# EAGLE board Meshtastic-DIY_v2.2 (EAGLE 9.6.2)
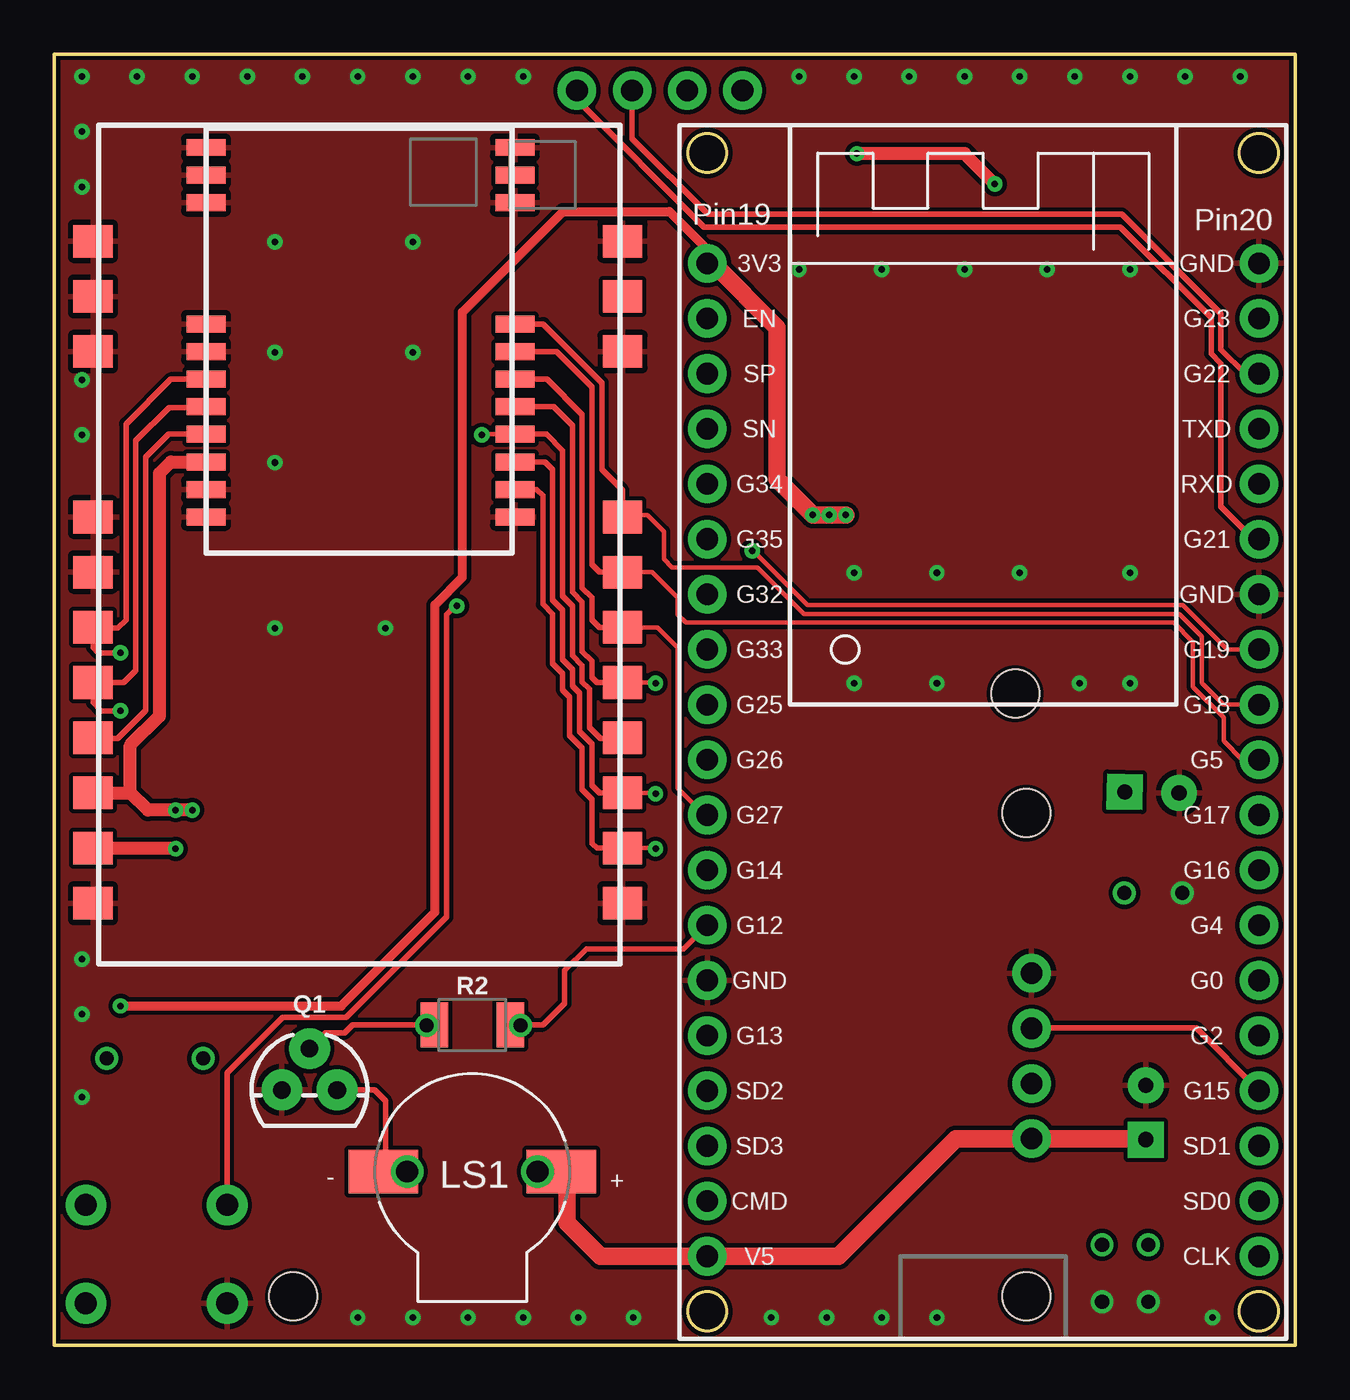
[diagram p0: board, top side]
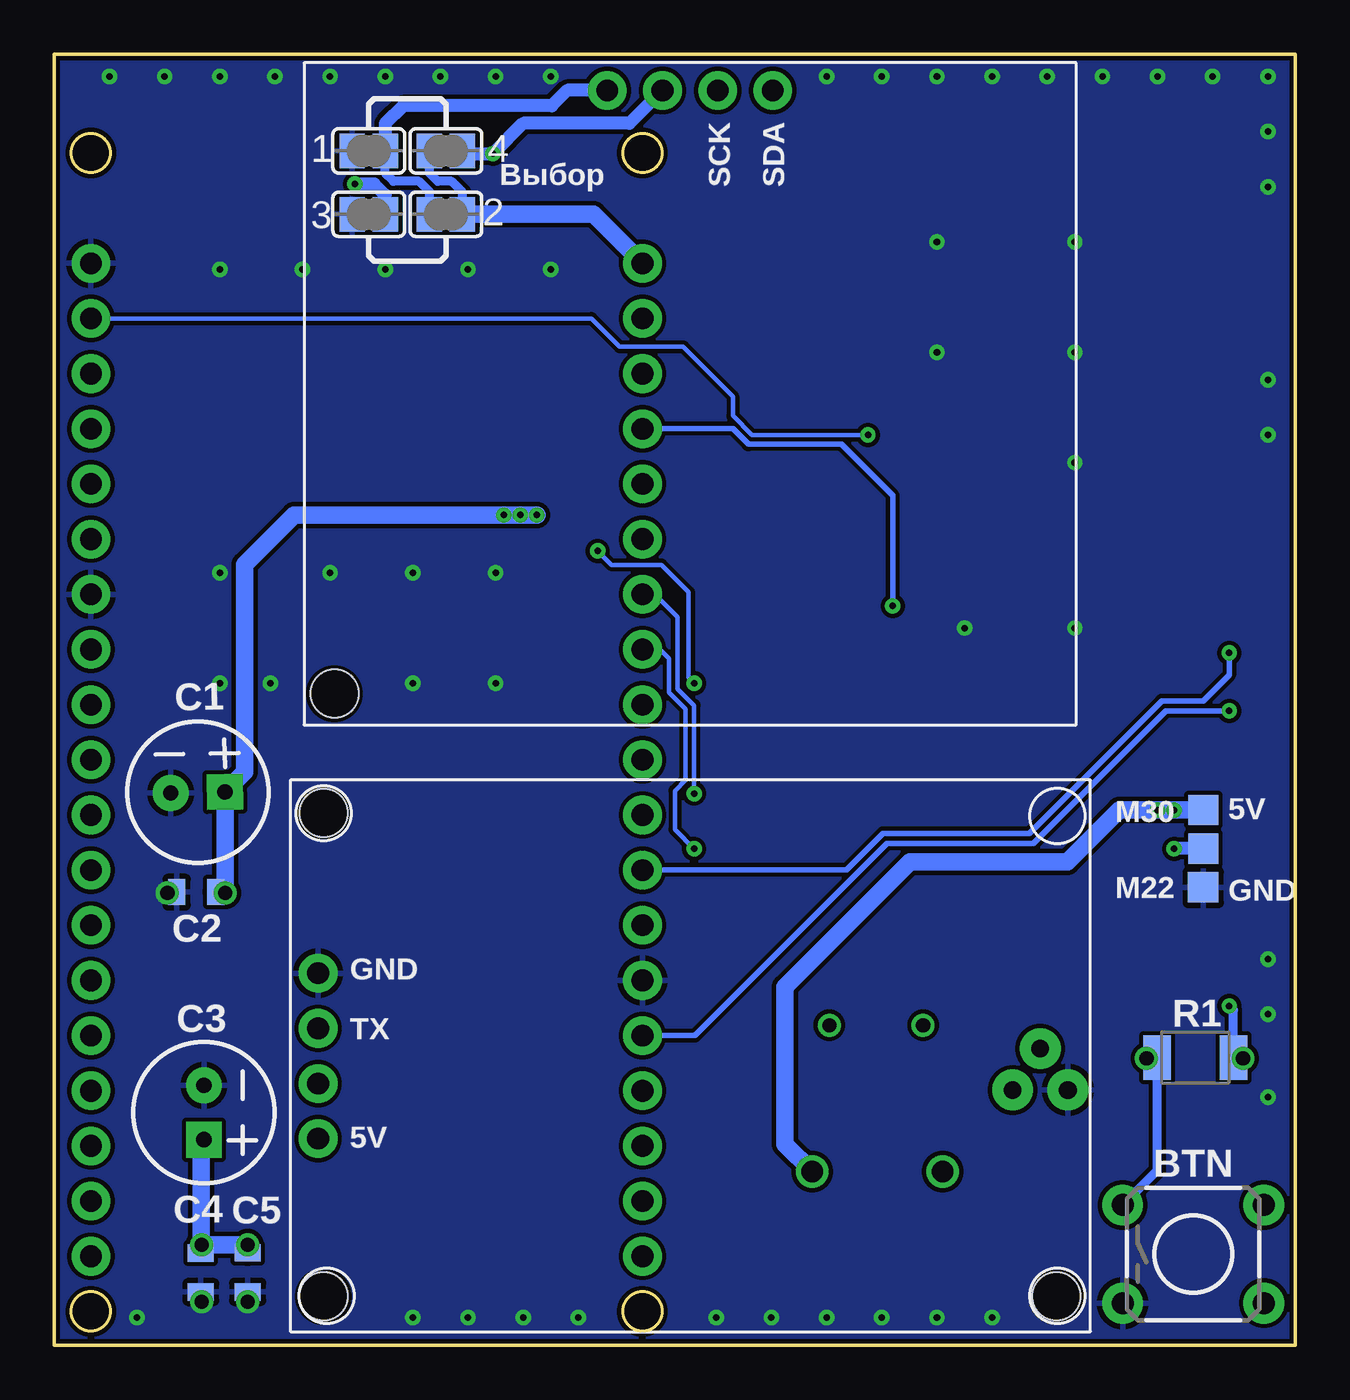
[diagram p1: board, bottom side, seen from below]

Size 57.15 x 59.44 mm. Coordinates in mm from the lower left corner, seen from the top.
Outline: 0,59.44 0,0 57.15,0 57.15,59.44 0,59.44
Copper layers (1*16): Top 0.035mm / dielectric 1.5mm / Bottom 0.035mm
Design rules "default *": minimum track width 0.2mm, minimum drill 0.25mm, track to track 0.2mm, track to pad 0.2mm, pad to pad 0.2mm, via to via 0.2mm, smd to smd 6mil, copper to edge 0.2mm, drill to drill 0.2mm, minimum pad ring 10mil, minimum via ring 8mil, stop-mask expansion 4mil, vias tented up to drill 0.35mm, thermal gap 10mil
Holes 2.2 mm at 44.75,24.5 44.75,2.25 11,2.25 44.25,30

## Footprints (pad centres in the part's own frame; a part is rotated, then mirrored left to right if it is on the bottom)
SJ = smd 1.168 x 1.6: 1 -0.762,0; 2 0.762,0
TACTILE_SWITCH_PTH_6.0MM = drill 1.016 pad 1.88: 1 -3.251,2.261; 2 3.251,2.261; 3 -3.251,-2.261; 4 3.251,-2.261
CPOL-RADIAL-2.5MM-6.5MM = drill 0.7 pad 1.651 square: 1 1.25,0 | drill 0.7 pad 1.651: 2 -1.25,0
0805 = smd 0.8 x 1.2: 1 -0.9,0; 2 0.9,0
NODEMCU_ESP32_WROOM_32--38PINS = drill 1 pad 1.778: 1 -13.97,-27.94; 2 -13.97,-25.4; 3 -13.97,-22.86; 4 -13.97,-20.32; 5 -13.97,-17.78; 6 -13.97,-15.24; 7 -13.97,-12.7; 8 -13.97,-10.16; 9 -13.97,-7.62; 10 -13.97,-5.08; 11 -13.97,-2.54; 12 -13.97,0; 13 -13.97,2.54; 14 -13.97,5.08; 15 -13.97,7.62; 16 -13.97,10.16; 17 -13.97,12.7; 18 -13.97,15.24; 19 -13.97,17.78; 20 11.43,17.78; 21 11.43,15.24; 22 11.43,12.7; 23 11.43,10.16; 24 11.43,7.62; 25 11.43,5.08; 26 11.43,2.54; 27 11.43,0; 28 11.43,-2.54; 29 11.43,-5.08; 30 11.43,-7.62; 31 11.43,-10.16; 32 11.43,-12.7; 33 11.43,-15.24; 34 11.43,-17.78; 35 11.43,-20.32; 36 11.43,-22.86; 37 11.43,-25.4; 38 11.43,-27.94
XDCR_CMT-0926-86-SMT-TR = smd 3.2 x 2: N 4.1,0; P -4.1,0
TO-92 = drill 0.813 pad 1.88: 1 -1.27,0; 2 0,1.905; 3 1.27,0
1210 = smd 1.27 x 2.06: 1 -1.755,0; 2 1.755,0
TP14SQ = smd 1.4 x 1.4: TP 0,0
E22-XXXM30S = smd 1.8 x 1.5: P$1 -11.938,15.24; P$2 -11.938,12.7; P$3 -11.938,10.16; P$4 -11.938,2.54; P$5 -11.938,0; P$6 -11.938,-2.54; P$7 -11.938,-5.08; P$8 -11.938,-7.62; P$9 -11.938,-10.16; P$10 -11.938,-12.7; P$11 -11.938,-15.24; P$12 12.446,-15.24; P$13 12.446,-12.7; P$14 12.446,-10.16; P$15 12.446,-7.62; P$16 12.446,-5.08; P$17 12.446,-2.54; P$18 12.446,0; P$19 12.446,2.54; P$20 12.446,10.16; P$21 12.446,12.7; P$22 12.446,15.24
1.3"OLED = drill 1 pad 1.778: GND 2.54,0; SCL 5.08,0; SDA 7.62,0; VCC 0,0
E22-XXXM22S = smd 1.8 x 0.78: P$1 -6.858,8.763; P$2 -6.858,7.493; P$3 -6.858,6.223; P$4 -6.858,0.635; P$5 -6.858,-0.635; P$6 -6.858,-1.905; P$7 -6.858,-3.175; P$8 -6.858,-4.445; P$9 -6.858,-5.715; P$10 -6.858,-6.985; P$11 -6.858,-8.255; P$12 7.366,-8.255; P$13 7.366,-6.985; P$14 7.366,-5.715; P$15 7.366,-4.445; P$16 7.366,-3.175; P$17 7.366,-1.905; P$18 7.366,-0.635; P$19 7.366,0.635; P$20 7.366,6.223; P$21 7.366,7.493; P$22 7.366,8.763
GPS-NEO = drill 1 pad 1.778: P$1 -3.81,16.51; P$2 -1.27,16.51; P$3 1.27,16.51; P$4 3.81,16.51

## Placement (x,y rotation side)
1  [SJ]  42.67,54.99 0 bottom
2  [SJ]  39.12,52.07 180 bottom
3  [SJ]  42.67,52.07 0 bottom
4  [SJ]  39.12,54.99 0 bottom
BTN  MOMENTARY-SWITCH-SPST-PTH-6.0MM  [TACTILE_SWITCH_PTH_6.0MM]  4.71,4.2 0 bottom
C1  100uF  [CPOL-RADIAL-2.5MM-6.5MM]  50.54,25.46 1.1 bottom
C2  100nF  [0805]  50.61,20.86 180 bottom
C3  100uF  [CPOL-RADIAL-2.5MM-6.5MM]  50.26,10.71 270 bottom
C4  100nF  [0805]  50.41,3.35 270 bottom
C5  100nF  [0805]  48.24,3.35 270 bottom
ESP32-1  [NODEMCU_ESP32_WROOM_32--38PINS]  44.04,32.04 0 top
LS1  CMT-0926-86-SMT-TR  [XDCR_CMT-0926-86-SMT-TR]  19.25,8 180 top
Q1  200mA/40V  [TO-92]  11.75,11.75 0 top
R1  10k  [1210]  4.61,13.25 180 bottom
R2  1k  [1210]  19.25,14.75 0 top
TP1  TPTP14SQ  [TP14SQ]  4.24,24.65 270 bottom
TP2  TPTP14SQ  [TP14SQ]  4.24,22.87 270 bottom
TP3  TPTP14SQ  [TP14SQ]  4.25,21.09 270 bottom
U1  E22-XXXM30S  [E22-XXXM30S]  13.72,35.59 0 top
U$1  13"OLED13"OLED  [1.3"OLED]  31.69,57.78 0 bottom
U$2  E22-XXXM22S  [E22-XXXM22S]  13.85,46.39 0 top
U$3  GPS-NEO  [GPS-NEO]  28.49,13.32 90 bottom

## Library data of the parts
1-4 = jumper
BTN = SparkFun-Switches; PROD_ID: SWCH-08441; SF_SKU: COM-00097
C1 C3 = SparkFun-Capacitors; PROD_ID: CAP-08439
C2 C4 C5 = SparkFun-Capacitors; PROD_ID: CAP-08469
ESP32-1 = ESP32 NODEMCU WROOM 32; ESP: ESP32 WROOM 32
LS1 = CMT-0926-86-SMT-TR; AVAILABILITY: In Stock; CUI_PURCHASE_URL: https://www.cuidevices.com/product/audio/buzzers/audio-transducers/cmt-0926-86-smt-tr?utm_source=snapeda.com&utm_medium=referral&utm_campaign=snapedaBOM; DESCRIPTION: 9 mm, 3.6 Vo-p, 86 dB, Surface Mount (SMT), Magnetic Audio Transducer Buzzer; MF: CUI Devices; MP: CMT-0926-86-SMT-TR; PACKAGE: CUI Inc.; PRICE: None; PURCHASE-URL: https://pricing.snapeda.com/search/part/CMT-0926-86-SMT-TR/?ref=eda
Q1 = SparkFun-DiscreteSemi; PROD_ID: TRANS-08447
R1 R2 = SparkFun-Resistors; PROD_ID: RES-12374
TP1-TP3 = testpad
U1 U$2 = E22-XXXMXXS
U$1 U$3 = 13oled

## Nets
+3V3: 2.1 4.1 C1.1 C2.1 ESP32-1.19 R1.1
+5V: C3.1 C4.1 C5.1 ESP32-1.1 LS1.P TP1.TP U1.P$9 U$2.P$9 U$3.P$1
BTN: BTN.1 ESP32-1.16 R1.2
BUSY: ESP32-1.13 U1.P$14 U$2.P$14
CMD/G11/RTS: ESP32-1.2
DIO0: ESP32-1.10
GND: 1.1 3.1 BTN.3 C1.2 C2.2 C3.2 C4.2 C5.2 ESP32-1.6 ESP32-1.20 ESP32-1.26 Q1.1 TP3.TP U1.P$1 U1.P$2 U1.P$3 U1.P$4 U1.P$5 U1.P$11 U1.P$12 U1.P$20 U1.P$22 U$2.P$1 U$2.P$2 U$2.P$3 U$2.P$4 U$2.P$5 U$2.P$10 U$2.P$11 U$2.P$12 U$2.P$20 U$2.P$22 U$3.P$4
GPS_TX: ESP32-1.35 U$3.P$3
IRQ: ESP32-1.12 U1.P$13 U$2.P$13
LCD_SCK: ESP32-1.22 U$1.SCL
LCD_SDA: ESP32-1.25 U$1.SDA
MISO: ESP32-1.27 U1.P$16 U$2.P$16
MOSI: ESP32-1.9 U1.P$17 U$2.P$17
N$1: 1.2 2.2 U$1.VCC
N$2: 3.2 4.2 U$1.GND
N$3: U$3.P$2
N$4: LS1.N Q1.3
N$5: ESP32-1.7 R2.2
N$6: Q1.2 R2.1
N$9: U1.P$8 U$2.P$8
NSS: ESP32-1.28 U1.P$19 U$2.P$19
RST: ESP32-1.21 U1.P$15 U$2.P$15
RXEN: ESP32-1.8 U1.P$6 U$2.P$6
SCK: ESP32-1.29 U1.P$18 U$2.P$18
TXEN: ESP32-1.5 U1.P$7 U$2.P$7
VCC2: TP2.TP U1.P$10

## Tracks (layer width: path | path; a pad name or v marks a point on that pad's centre or on a via)
+3V3  (via drill 0.3, 0.65)
  Top 0.2: v35.69,38.23 v36.45,38.23
  Top 0.406: v3.05,15.62 13.21,15.62 17.53,19.94 17.53,34.09 18.8,35.36 18.8,47.57 23.42,52.2 28.32,52.2 30.07,50.45 ESP32-1.19
  Top 0.813: ESP32-1.19 30.32,49.82 33.27,46.86 33.27,39.88 v34.92,38.23 v36.45,38.23
  Bottom 0.2: R1.1 2.82,13.21 v2.41,13.21
  Bottom 0.406: R1.1 2.85,15.43 v3.05,15.62 | 2.1 38.35,53.09 38.86,53.59 39.5,53.59 39.88,53.98 4.1
  Bottom 0.813: v34.92,38.23 46.1,38.23 48.39,35.94 48.39,26.38 C1.1 49.29,21.29 C2.1 49.67,20.83 v49.28,20.83 | ESP32-1.19 32.32,52.07 2.1
+5V  (via drill 0.3, 0.65, 1)
  Top 0.254: LS1.P v22.25,8
  Top 0.406: U$2.P$9 6.96,40.64 | 1.81,25.4 U1.P$9
  Top 0.61: 3.5,25.45 3.5,27.63 4.84,28.97 4.84,40.15 5.37,40.67 U$2.P$9 | 3.5,25.45 4.32,24.64 v5.59,24.64 v6.35,24.64 | U1.P$9 3.48,25.43 3.5,25.45
  Top 0.813: LS1.P 23.61,7.74 23.61,5.64 25.15,4.1 ESP32-1.1 36.1,4.1 41.51,9.51 U$3.P$1 50.21,9.51 C3.1
  Bottom 0.406: v48.25,4.62 C5.1 | 50.4,4.59 C4.1
  Bottom 0.61: C4.1
  Bottom 0.813: C5.1 | TP1.TP v5.58,24.65 | v5.58,24.65 v5.59,24.64 | v22.25,8 23.5,9.25 23.5,16.5 17.75,22.25 10.5,22.25 8.1,24.65 v5.58,24.65 | v50.37,4.62 v48.25,4.62 | v50.37,4.62 50.4,4.59 | C3.1 50.38,9.34 50.38,4.64 v50.37,4.62
BTN  (via drill 0.3, 0.65)
  Top 0.254: BTN.1 7.96,12.53 10.52,15.09 13.43,15.09 18.06,19.72 18.06,33.66 18.44,34.04 v18.54,34.04
  Bottom 0.2: R1.2 6.4,13.21 v6.86,13.21
  Bottom 0.254: v18.54,34.04 18.54,39.12 20.91,41.48 25.2,41.48 25.91,42.2 ESP32-1.16
  Bottom 0.406: BTN.1 6.36,8.05 R1.2
BUSY  (via drill 0.3)
  Top 0.2: U1.P$14 27.65,25.43 v27.69,25.4
  Top 0.254: U$2.P$14 22.59,40.67 22.95,40.31 22.95,34.31 23.4,33.85 23.4,31.57 23.86,31.12 23.86,30.36 24.18,30.03 24.18,28.26 24.77,27.68 24.77,25.78 25.11,25.43 U1.P$14
  Bottom 0.2: v27.69,25.4 27.69,29.46 28.45,30.23 28.45,33.53 29.5,34.58 ESP32-1.13
GND  (via drill 0.3, 0.65)
  Bottom 0.406: v48.25,2 v48.24,2 C5.2 | v50.37,2 50.37,2.41 C4.2
  Bottom 0.813: C2.2 51.91,20.86 v51.94,20.83
  other vias: 1.27,58.42 3.81,58.42 6.35,58.42 8.89,58.42 11.43,58.42 13.97,58.42 16.51,58.42 19.05,58.42 21.59,58.42 34.29,58.42 36.83,58.42 39.37,58.42 41.91,58.42 44.45,58.42 46.99,58.42 49.53,58.42 52.07,58.42 54.61,58.42 1.27,55.88 1.27,53.34 1.27,44.45 1.27,41.91 1.27,17.78 1.27,15.24 1.27,11.43 13.97,1.27 16.51,1.27 19.05,1.27 21.59,1.27 24.13,1.27 26.67,1.27 33.02,1.27 35.56,1.27 38.1,1.27 40.64,1.27 53.34,1.27 36.83,35.56 40.64,35.56 44.45,35.56 49.53,35.56 36.83,30.48 40.64,30.48 47.2,30.48 49.53,30.48 34.29,49.53 38.1,49.53 41.91,49.53 45.72,49.53 49.53,49.53 10.16,33.02 15.24,33.02 10.16,50.8 10.16,45.72 10.16,40.64 16.51,50.8 16.51,45.72
  pour Top: -0.25,59.75 57.5,59.75 57.5,-0.25 -0.25,-0.25
  pour Bottom: -0.5,60 57.75,60 57.75,-0.5 -0.5,-0.5
GPS_TX
  Top 0.254: ESP32-1.35 52.58,14.61 45.02,14.61 U$3.P$3
IRQ  (via drill 0.3)
  Top 0.2: U1.P$13 27.65,22.89 v27.69,22.86
  Top 0.254: U$2.P$13 22.21,39.4 22.5,39.12 22.5,34.12 22.95,33.66 22.95,31.39 23.4,30.93 23.4,30.17 23.73,29.84 23.73,28.07 24.31,27.49 24.31,25.59 24.77,25.14 24.77,23.11 24.99,22.89 U1.P$13
  Bottom 0.2: ESP32-1.12 29.26,32.04 28.85,31.62 28.85,30.06 28.09,29.3 28.09,26.02 28.57,25.53 28.57,23.75 v27.69,22.86
LCD_SCK
  Top 0.254: ESP32-1.22 54.83,44.74 53.72,45.85 53.72,47.5 49.15,52.07 30.1,52.07 26.61,55.56 U$1.SCL
LCD_SDA
  Top 0.254: ESP32-1.25 55.21,37.12 53.72,38.61 53.72,45.2 53.27,45.66 53.27,47.31 49.09,51.49 29.92,51.49 24.07,57.34 | 24.07,57.34 | U$1.SDA 24.07,57.34
MISO  (via drill 0.3)
  Top 0.2: ESP32-1.27 54,32.04 51.96,34.07 34.69,34.07 32.19,36.58 v32.13,36.58 | U1.P$16 27.65,30.51 v27.69,30.48
  Top 0.254: U$2.P$16 22.99,43.21 23.86,42.34 23.86,34.68 24.31,34.23 24.31,31.95 24.77,31.5 24.77,30.73 24.99,30.51 U1.P$16
  Bottom 0.2: v27.69,30.48 27.94,30.73 27.94,34.67 29.2,35.93 31.48,35.93 v32.13,36.58
MOSI
  Top 0.2: U1.P$17 27.78,33.05 28.7,32.13 28.7,25.65 29.94,24.42 ESP32-1.9
  Top 0.254: U$2.P$17 22.68,44.48 24.31,42.85 24.31,34.87 24.77,34.42 24.77,33.4 25.11,33.05 U1.P$17
N$1
  Bottom 0.406: 2.2 39.88,53.12 40.35,53.59 41.53,53.59 41.91,53.98 1.2
  Bottom 0.61: U$1.VCC 33.53,57.78 34.24,57.07 41.1,57.07 41.91,56.26 1.2
N$2  (via drill 0.3)
  Top 0.61: v43.31,53.47 41.91,54.86 v36.96,54.86
  Bottom 0.61: U$1.GND 30.66,56.26 35.56,56.26 v36.96,54.86 38.23,54.86 4.2 | 3.2 41.91,52.96 42.42,53.47 v43.31,53.47
N$4  (via drill 1)
  Top 0.254: Q1.3 14.75,11.75 15.25,11.25 15.25,8.52 15.17,8.45 15.17,8.02 LS1.N v16.25,8
N$5  (via drill 0.65)
  Top 0.2: 21.45,14.75 21.84,14.75 | v21.46,14.73 21.45,14.75 | 21.45,14.75 21.08,14.75 R2.2
  Top 0.254: ESP32-1.7 28.98,18.25 24.5,18.25 23.5,17.25 23.5,15.75 22.5,14.75 21.97,14.75 21.84,14.75 R2.2 21.02,14.73 v21.46,14.73 21.1,14.73 21.08,14.75
N$6  (via drill 0.65)
  Top 0.2: 17.02,14.75 R2.1 17.48,14.73 v17.14,14.73
  Top 0.254: Q1.2 12.48,14.39 13.37,14.39 13.73,14.75 17.02,14.75
N$9
  Top 0.254: U$2.P$8 5.26,41.94 4.21,40.89 4.21,29.23 2.92,27.94 1.81,27.94 U1.P$8
NSS
  Top 0.2: ESP32-1.28 53.82,29.5 52.83,30.48 52.83,32.64 51.8,33.67 34.52,33.67 32.38,35.81 28.45,35.81 28.07,36.2 28.07,37.47 27.3,38.23 26.16,38.23
  Top 0.254: U$2.P$19 22.51,47.02 25.22,44.31 25.22,40.31 26.16,39.37 26.16,38.23 U1.P$19
RST  (via drill 0.3)
  Top 0.2: U$2.P$15 19.72,41.94 v19.68,41.91
  Top 0.254: U$2.P$15 22.66,41.94 23.4,41.2 23.4,34.49 23.86,34.04 23.86,31.76 24.31,31.31 24.31,30.55 24.64,30.22 24.64,28.45 25.15,27.94 26.13,27.94 U1.P$15
  Bottom 0.2: ESP32-1.21 32.42,47.28 31.11,45.97 28.19,45.97 25.91,43.69 25.91,42.8 25.02,41.91 v19.68,41.91
RXEN  (via drill 0.3)
  Top 0.254: U$2.P$6 5.37,44.48 3.3,42.42 3.3,33.4 2.92,33.02 1.81,33.02 U1.P$6 1.78,32.13 2.03,31.88 v3.05,31.88
  Bottom 0.254: v3.05,31.88 3.05,30.86 4.25,29.66 6.16,29.66 12.25,23.57 18.99,23.57 20.68,21.88 ESP32-1.8
SCK
  Top 0.2: U1.P$18 27.53,35.59 28.7,34.42 28.7,33.66 29.08,33.27 51.54,33.27 52.43,32.38 52.43,30.31 53.85,28.9 53.85,27.81 54.7,26.96 ESP32-1.29
  Top 0.254: U$2.P$18 23.14,45.75 24.77,44.12 24.77,35.94 25.11,35.59 U1.P$18
TXEN  (via drill 0.3)
  Top 0.254: U$2.P$7 6.96,43.18 5.28,43.18 3.76,41.66 3.76,31.06 3.21,30.51 U1.P$7 1.78,29.59 2.16,29.21 v3.05,29.21
  Bottom 0.254: ESP32-1.5 27.65,14.26 25.91,16 25.91,16.01 18.8,23.11 12.06,23.11 5.97,29.21 v3.05,29.21
VCC2  (via drill 0.3)
  Top 0.61: U1.P$10 5.56,22.89 v5.59,22.86
  Bottom 0.61: TP2.TP v5.58,22.87 v5.59,22.86

## Text on the board
bNames: SDA | SCK | Выбор | 5V | M30 | M22 | GND | GND | TX | 5V